# Altium PCB shop roaster psu module board.PcbDoc
Units mil, origin at the board's own origin, x right, y up, seen from the top; angles counter-clockwise.
Board outline 6000 x 4000 mil, 2 copper layers (Top Layer, Bottom Layer); 26 components, 17 nets, 86 pads, 0 vias.
Unrouted connection lines stored in the file: 63.
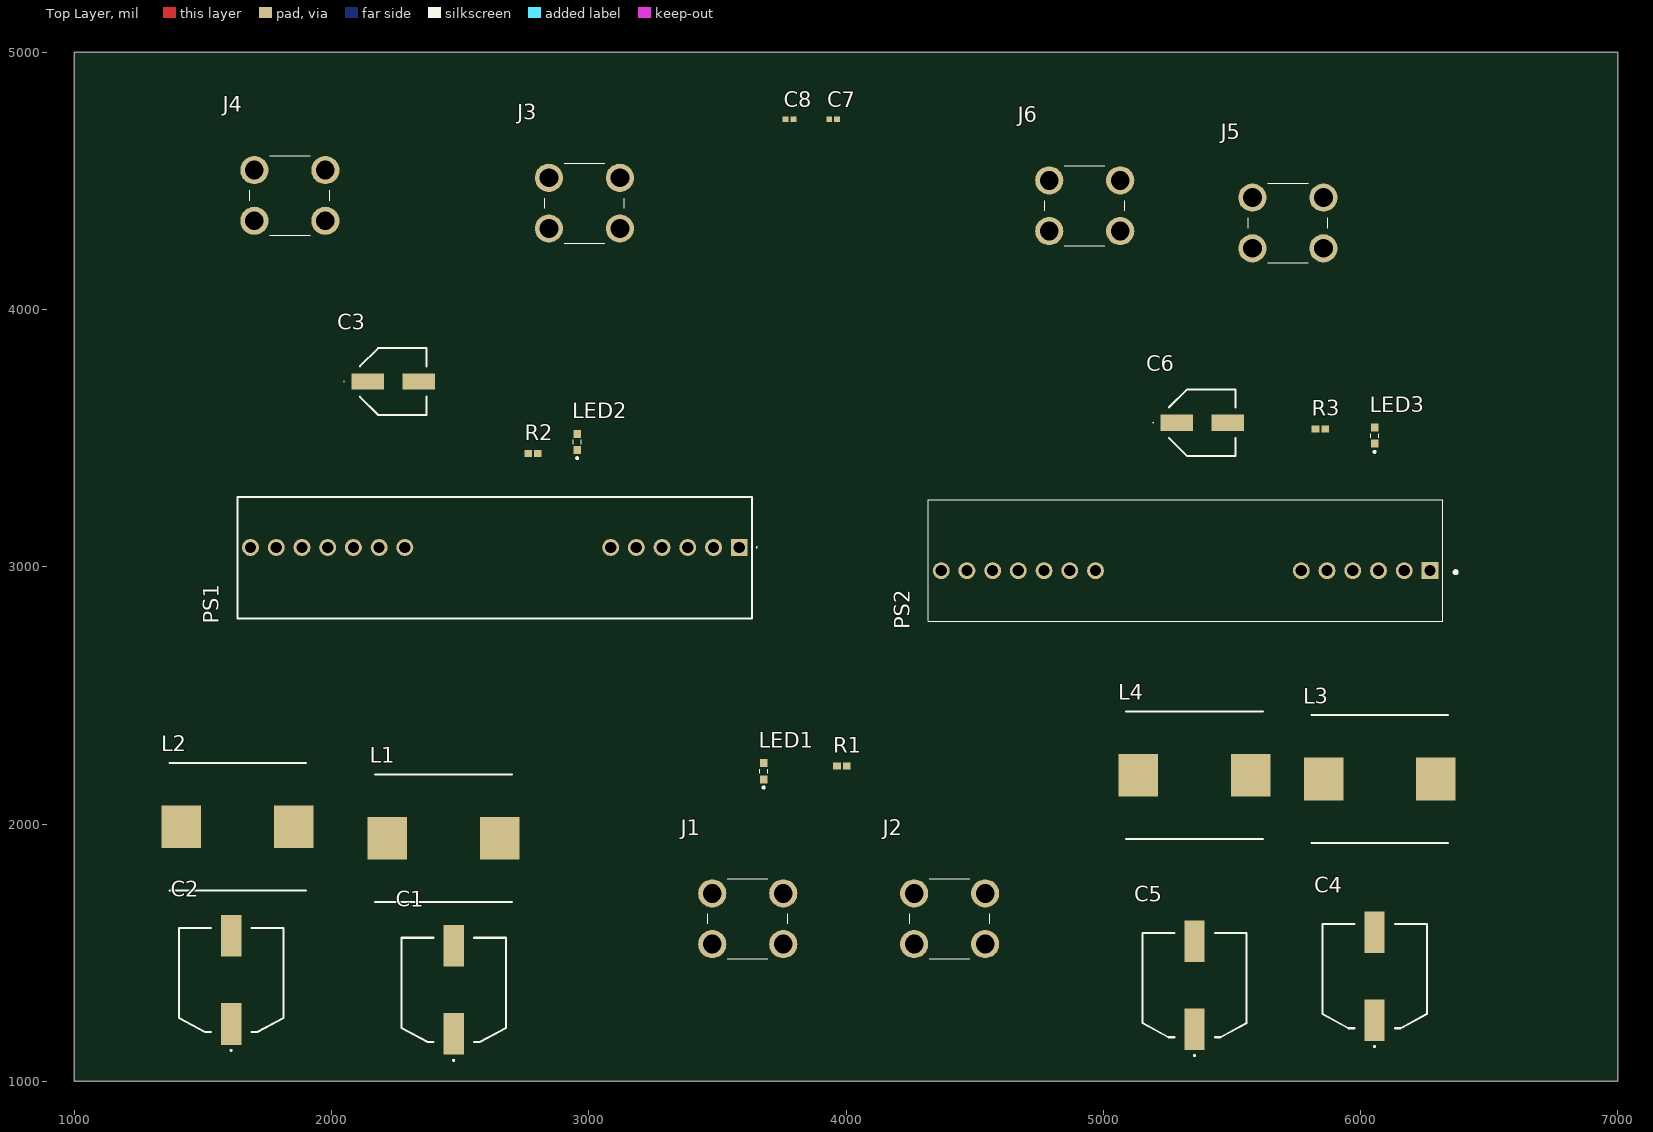
[diagram p0: Top Layer view]
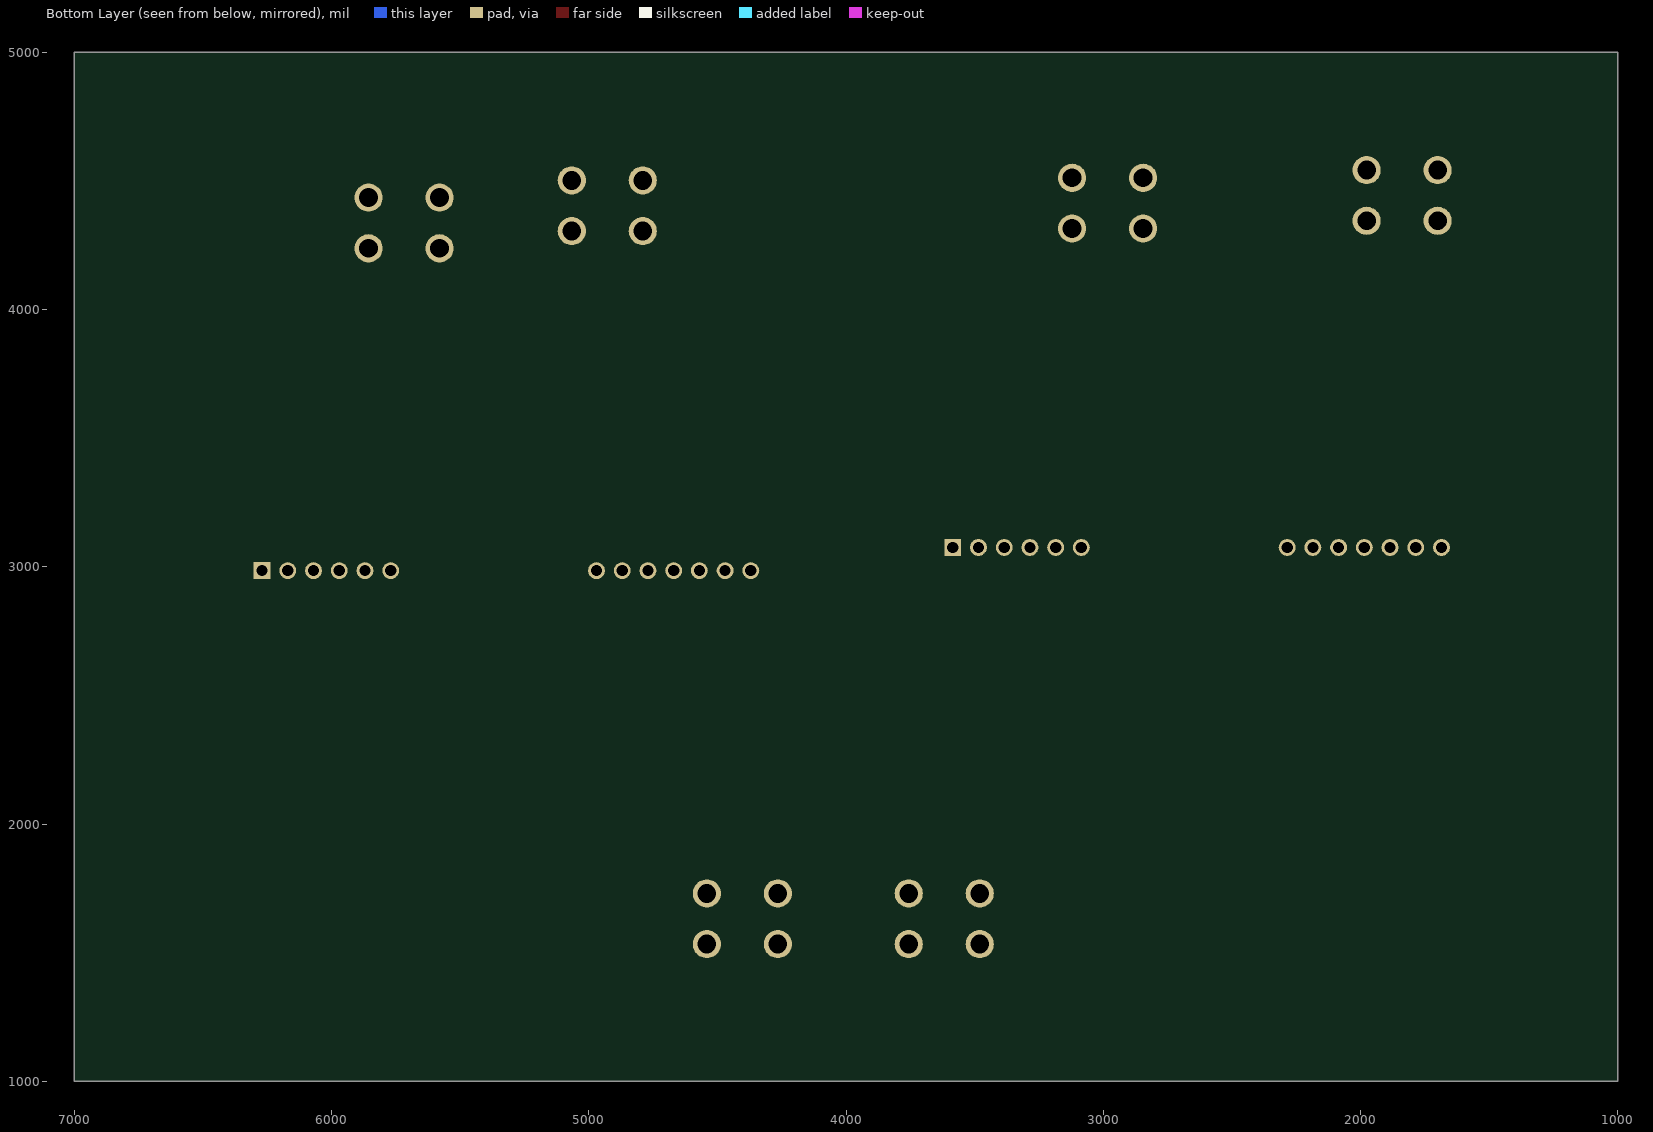
[diagram p1: Bottom Layer view, seen from below]

## Layer stack, top to bottom
Top Solder: solder mask 0.4, Solder Resist, Dk 3.5
Top Layer: signal copper 1.4
Dielectric 1: dielectric 12.6, FR-4, Dk 4.8
Bottom Layer: signal copper 1.4
Bottom Solder: solder mask 0.4, Solder Resist, Dk 3.5

## Board outline
1000,1000 7000,1000 7000,5000 1000,5000

## Design rules (kind name [scope] priority, off if disabled: settings)
Clearance [All] p1: gap=10 ignorepadtopadclearanceinfootprint=FALSE except(0: Arc-Hole Track-Hole SMDPad-Hole THPad-Hole Via-Hole Fill-Hole Poly-Hole Region-Hole Text-Hole)
PolygonConnect [All] p1: connectstyle=Relief reliefconductorwidth=10 reliefentries=4 polygonreliefangle="90 Angle" airgapwidth=10
RoutingVias [All] p1: holewidth=28 width=50 viastyle="Through Hole" minholewidth=28 minwidth=50 maxholewidth=28 maxwidth=50
SolderMaskExpansion [All] p1: expansion=4 istentingtop=FALSE
Width [All] p1: maxlimit=10 minlimit=10 preferedwidth=10
30 further rules are at their usual default settings.

## Classes and differential pairs
component class "shop roaster psu module board": C2 L3 PS2

## Components (designator, comment, footprint, x,y, rotation, side; value= is the part's Value field where it differs from the comment)
C1 "EEE-FK1J121SL" EEEFK1V331P 2475,1355 r0 top
C2 "EEE-FK1J121SL" EEEFK1V331P 1610,1393.74 r0 top
C3 "EEE-FK1J220XP" EEE0JA331XP 2240,3720 r0 top
C4 "EEE-FK1J121SL" EEEFK1V331P 6055,1408.74 r0 top
C5 "EEE-FK1J121SL" EEEFK1V331P 5355,1373.74 r0 top
C6 "EEE-FK1J220XP" EEE0JA331XP 5385,3560 r0 top
C7 "Capacitor 0.1 uF +/- 5% 16 V 0402" CAPC1005X56X25LL10T15 3950,4740 r0 top value=100nF
C8 "Capacitor 0.1 uF +/- 5% 16 V 0402" CAPC1005X56X25LL10T15 3780,4740 r0 top value=100nF
J1 "8191-2" 81912 3480,1532.99 r90 top
J2 "8191-2" 81912 4265,1532.99 r90 top
J3 "8191-2" 81912 2845,4315 r90 top
J4 "8191-2" 81912 1700,4345 r90 top
J5 "8191-2" 81912 5580,4237.99 r90 top
J6 "8191-2" 81912 4790,4305 r90 top
L1 "SRP1265C-150M" INDPM135126X650N 2435,1945 r0 top
L2 "SRP1265C-150M" INDPM135126X650N 1635,1990 r0 top
L3 "SRP1265C-150M" INDPM135126X650N 6075,2175 r0 top
L4 "SRP1265C-150M" INDPM135126X650N 5355,2190 r0 top
LED1 "150060RS55040" 150060RS55040 3680,2205 r90 top
LED2 "150060RS55040" 150060RS55040 2955,3485 r90 top
LED3 "150060RS55040" 150060RS55040 6055,3510 r90 top
PS1 "NID100-24" NID10024 3585,3075 r180 top
PS2 "NID100-12" NID10012 6270,2985 r180 top
R1 "Resistor 15k +/-1% 0402 63 mW" RESC1005X40X25ML10T10 3983.7,2225 r0 top value=15k
R2 "Resistor 15k +/-1% 0402 63 mW" RESC1005X40X25ML10T10 2783.7,3440 r0 top value=15k
R3 "Resistor 15k +/-1% 0402 63 mW" RESC1005X40X25ML10T10 5843.7,3535 r0 top value=15k

## Footprints (in the part's own frame and the unit in brackets; to place one, negate y for a bottom-side part, rotate by r counter-clockwise, add the part's x,y. Pads: shape width x height; smd on the part's side, far side on the other; paste and mask are expansions set on the pad)
81912 [mil]
  round 109.49 hole 73: 1(0,0) 2(197.01,0) 3(0,-275.98) 4(197.01,-275.98)
  silkscreen extent -56,-293 254,17, body extent -394,-133 394,133, height 228
150060RS55040 [mm]
  rect 0.8x0.75 smd: 1(-0.8,0) 2(0.8,0)
  silkscreen extent -1.7,-0.4 0.2,0.4
CAPC1005X56X25LL10T15 [mm] "Chip Capacitor, 2-Leads, Body 1.10x0.60mm, IPC High Density"
  rect 0.58x0.54 smd: 1(-0.39,0) 2(0.39,0)
  body extent -0.55,-0.3 0.55,0.3, height 0.56
EEE0JA331XP [mm]
  rect 3.2x1.6 smd: 1(-2.5,0) 2(2.5,0)
  silkscreen extent -4.88,-3.3 3.3,3.3, body extent -3.65,-3.3 3.65,3.3, height 7.7
EEEFK1V331P [mm]
  rect 2x4.1 smd: 1(0,-4.35) 2(0,4.35)
  silkscreen extent -5.15,-7 5.15,5.15, body extent -5.15,-5.85 5.15,5.85, height 10.3
INDPM135126X650N [mm]
  rect 3.9x4.2 smd: 1(-5.55,0) 2(5.55,0)
  silkscreen extent -6.75,-6.3 6.75,6.3, body extent -6.75,-6.3 6.75,6.3, height 6.5
NID10012 [mm]
  rect 1.665x1.665 hole 1.11: 1(0,0)
  round 1.665 hole 1.11: 2(2.54,0) 3(5.08,0) 4(7.62,0) 5(10.16,0) 6(12.7,0) 7(33.02,0) 8(35.56,0) 9(38.1,0) 10(40.64,0) 11(43.18,0) 12(45.72,0) 13(48.26,0)
  silkscreen extent -2.69,-7 49.53,5, body extent -1.27,-7 49.53,5, height 27.6
NID10024 [mm]
  rect 1.665x1.665 hole 1.11: 1(0,0)
  round 1.665 hole 1.11: 2(2.54,0) 3(5.08,0) 4(7.62,0) 5(10.16,0) 6(12.7,0) 7(33.02,0) 8(35.56,0) 9(38.1,0) 10(40.64,0) 11(43.18,0) 12(45.72,0) 13(48.26,0)
  silkscreen extent -1.8,-5 49.56,7, body extent -1.24,-5 49.56,7, height 27.6
RESC1005X40X25ML10T10 [mm] "Chip Resistor, 2-Leads, Body 1.1x0.6mm, IPC Low Density"
  rect 0.75x0.7 smd: 1(-0.475,0) 2(0.475,0)
  body extent -0.55,-0.27 0.55,0.28, height 0.4

## Part data
C1 C2 C4 C5: "Capacitor Polarised", Manufacturer_Name=Panasonic, Datasheet Link=http://industrial.panasonic.com/cdbs/www-data/pdf/RDE0000/RDE0000C1263.pdf, Manufacturer_Part_Number=EEE-FK1J121SL
C3 C6: "Capacitor Polarised", Manufacturer_Name=Panasonic, Mouser Part Number=667-EEE-FK1J220XP, Arrow Part Number=EEE-FK1J220XP, Arrow Price/Stock=https://www.arrow.com/en/products/eeefk1j220xp/panasonic, Datasheet Link=http://industrial.panasonic.com/cdbs/www-data/pdf/RDE0000/ABA0000C1181.pdf, Height=7.8mm, Manufacturer_Part_Number=EEE-FK1J220XP, Mouser Price/Stock=https://www.mouser.co.uk/ProductDetail/Panasonic/EEE-FK1J220XP?qs=qE6bgDGEOCtReXDhLMMdtw%3D%3D
C7 C8: library part CMP-001-00001-6, "Chip Capacitor, 0.1 uF, +/- 5%, 16 V, 0402 (1005 Metric)", Capacitor Type=Ceramic, Case/Package=0402, Max Operating Temperature=125°C, Min Operating Temperature=-55°C, Tolerance=5%, Voltage Rating=16V, Mounting Technology=SM, Pins=2, ROHS COMPLIANT=True
J1 J2 J3 J4 J5 J6: library part CMP-002-000000-1, "Keystone, Brass Screw Terminal, 22  14 AWG, 15A", Manufacturer_Name="Keystone Electronics", Mouser Part Number=534-8191-2, Design Item ID=8191-2, Geometry.Height=11.176mm, Manufacturer_Part_Number=8191-2, Mouser Price/Stock=https://www.mouser.co.uk/ProductDetail/Keystone-Electronics/8191-2?qs=zBlGwAMnvtcLi4%252BTp6EI2A%3D%3D, Source=8191-2.SchLib
L1 L2 L3 L4: "Inductor", Manufacturer_Name=Bourns, Mouser Part Number=652-SRP1265C-150M, Arrow Part Number=SRP1265C-150M, Arrow Price/Stock=https://www.arrow.com/en/products/srp1265c-150m/bourns?region=nac, Datasheet Link=https://www.mouser.cl/datasheet/2/54/Bourns_SRP1265C_datasheet-1775834.pdf, Height=6.5mm, Manufacturer_Part_Number=SRP1265C-150M, Mouser Price/Stock=https://www.mouser.co.uk/ProductDetail/Bourns/SRP1265C-150M?qs=OlC7AqGiEDnNYfbirifssw%3D%3D
LED1 LED2 LED3: "LED", Manufacturer_Name="Wurth Elektronik", Mouser Part Number=710-150060RS55040, Datasheet Link=http://katalog.we-online.de/led/datasheet/150060RS55040.pdf, Height=0mm, Manufacturer_Part_Number=150060RS55040, Mouser Price/Stock=https://www.mouser.co.uk/ProductDetail/Wurth-Elektronik/150060RS55040?qs=8Aam6%252B7C6HHnMZFlrlTntA%3D%3D
PS1: "Power Supply", Manufacturer_Name="Mean Well", Mouser Part Number=709-NID100-24, Arrow Part Number=NID100-24, Arrow Price/Stock=https://www.arrow.com/en/products/nid100-24/mean-well-enterprises?region=nac, Datasheet Link=https://www.meanwellusa.com/webapp/product/search.aspx?prod=NID100#1, Height=27.5mm, Manufacturer_Part_Number=NID100-24, Mouser Price/Stock=https://www.mouser.co.uk/ProductDetail/MEAN-WELL/NID100-24?qs=u16ybLDytRYj3KEXttNRbg%3D%3D
PS2: "Power Supply", Manufacturer_Name="Mean Well", Mouser Part Number=709-NID100-12, Arrow Part Number=NID100-12, Arrow Price/Stock=https://www.arrow.com/en/products/nid100-12/mean-well-enterprises?region=nac, Datasheet Link=https://www.meanwell-web.com/content/files/pdfs/productPdfs/MW/NID100/NID100-spec.pdf, Height=27.5mm, Manufacturer_Part_Number=NID100-12, Mouser Price/Stock=https://www.mouser.co.uk/ProductDetail/MEAN-WELL/NID100-12?qs=u16ybLDytRakdcW8%2FWhQZg%3D%3D
R1 R2 R3: library part CMP-009-00026-5, "Chip Resistor, 15 KOhm, +/- 1%, 0.063 W, -55 to 155 degC, 0402 (1005 Metric)", Case/Package=0402, Max Operating Temperature=155°C, Min Operating Temperature=-55°C, Power=63mW, Tolerance=1%, Mounting Technology=SM, Pins=2, ROHS COMPLIANT=True

## Nets (pads, with @x,y where several pads share a name; then routed paths per layer and width w, separated by ;. In a path a pad name is that pad's centre, name@x,y a point inside that pad or via, vN(x,y) a via of type N, cw(c..) or ccw(c..) an arc to the next point about the centre after c; other vN are vias at no path point)
5Vdc: C6.1 C7.2 J5.2 J5.4 LED3.2 PS2.1 PS2.2 PS2.3 PS2.4
24Vdc: C3.1 C8.2 J3.2 J3.4 LED2.2 PS1.1 PS1.2 PS1.3 PS1.4
48Vdc: J1.2 J1.4 LED1.2
48VRet: J2.2 J2.4 R1.1
Earth: C7.1 C8.1
GND: C2.2 C3.2 C5.2 C6.2 J4.2 J4.4 J6.2 J6.4 L2.1 L4.1 PS1.5 PS1.6 PS1.7 PS1.8 PS2.5 PS2.6 PS2.7 PS2.8 R2.1 R3.1
NetC1_1: C1.1 C4.1 J1.1 J1.3 L1.2 L3.2
NetC1_2: C1.2 C4.2 J2.1 J2.3 L2.2 L4.2
NetC2_1: C2.1 L1.1 PS1.9 PS1.10
NetC5_1: C5.1 L3.1 PS2.9 PS2.10
NetJ3_1: J3.1 J3.3
NetJ4_1: J4.1 J4.3
NetJ5_1: J5.1 J5.3
NetJ6_1: J6.1 J6.3
NetLED1_1: LED1.1 R1.2
NetLED2_1: LED2.1 R2.2
NetLED3_1: LED3.1 R3.2
pads on no net: PS1.11 PS1.12 PS1.13 PS2.11 PS2.12 PS2.13